# EAGLE board pc_pulse_v3 (EAGLE 6.6.0)
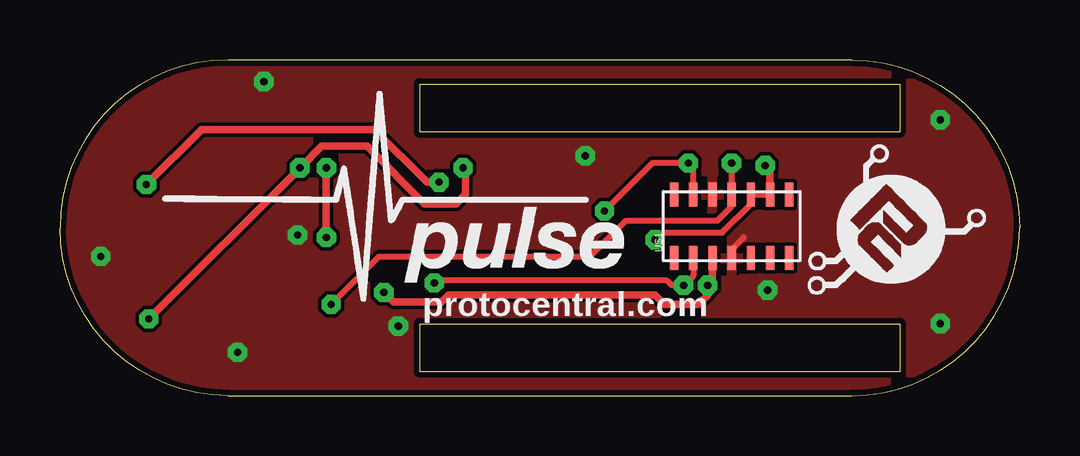
[diagram p0: board, top side]
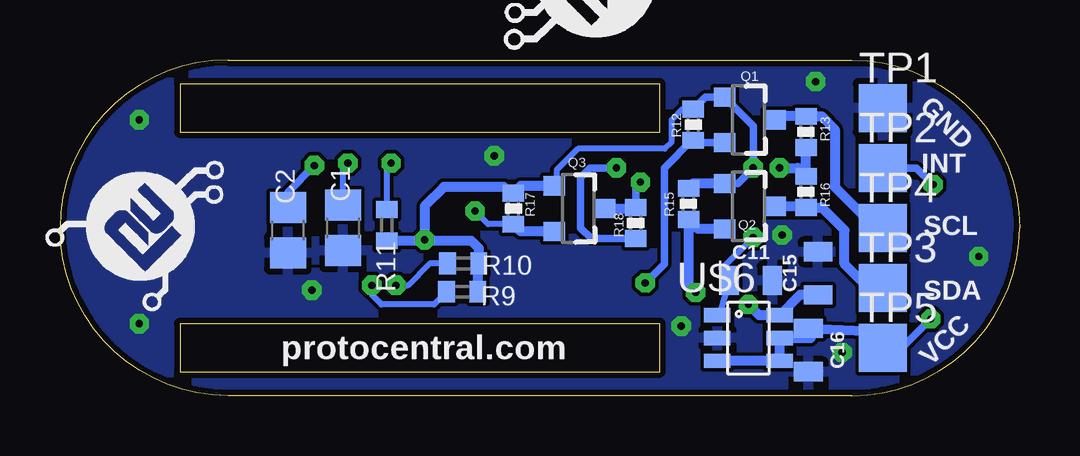
[diagram p1: board, bottom side, seen from below]

Size 40 x 14 mm. Coordinates in mm from the lower left corner, seen from the top.
Outline: 7,0 33,0 arc90 40,7 arc90 33,14 7,14 arc90 0,7 arc90 7,0
Outline: 15,13 35,13 35,11 15,11 15,13
Outline: 15,3 35,3 35,1 15,1 15,3
Copper layers (1*2*15*16): Top 0.035mm / dielectric 1.5mm / Route2 0.035mm / dielectric 0.15mm / Route15 0.035mm / dielectric 0.2mm / Bottom 0.035mm
Design rules "Circuitects-Rules": minimum track width 6mil, minimum drill 0.3mm, track to track 6mil, track to pad 6mil, pad to pad 6mil, via to via 6mil, smd to smd 6mil, copper to edge 10mil, drill to drill 8mil, minimum pad ring 12mil, minimum via ring 10mil, stop-mask expansion 4mil, vias tented up to drill 25mil, thermal gap 10mil

## Footprints (pad centres in the part's own frame; a part is rotated, then mirrored left to right if it is on the bottom)
C0805 = smd 1.3 x 1.5: 1 -0.95,0; 2 0.95,0
0805 = smd 0.8 x 1.2: 1 -0.9,0; 2 0.9,0
SOT23-3 = smd 0.8 x 0.9: 1 -0.95,-1; 2 0.95,-1; 3 0,1.1
R0402 = smd 0.7 x 0.9: 1 -0.65,0; 2 0.65,0
0402-RES = smd 0.7 x 0.9: 1 -0.65,0; 2 0.65,0
TP20SQ = smd 2 x 2: TP 0,0
OESIP-14 = smd 1 x 0.35: 1 -1.325,2.4; 2 -1.325,1.6; 3 -1.325,0.8; 4 -1.325,0; 5 -1.325,-0.8; 6 -1.325,-1.6; 7 -1.325,-2.4; 8 1.325,-2.4; 9 1.325,-1.6; 10 1.325,-0.8; 11 1.325,0; 12 1.325,0.8; 13 1.325,1.6; 14 1.325,2.4
SOT26 = smd 0.6 x 1.1: 1 -0.95,-1.3; 2 0,-1.3; 3 0.95,-1.3; 4 0.95,1.3; 5 0,1.3; 6 -0.95,1.3

## Placement (x,y rotation side)
C1  1uF  [C0805]  28.2,7 270 bottom
C2  10uF  [C0805]  30.5,6.9 270 bottom
C11  1.0uF  [0805]  11.2,4.8 0 bottom
C15  1.0uF  [0805]  8.4,5.1 90 bottom
C16  1.0uF  [0805]  8.8,1.9 270 bottom
Q1  BSS138  [SOT23-3]  11.3,11.5 270 bottom
Q2  BSS138  [SOT23-3]  11.3,7.9 270 bottom
Q3  BSS138  [SOT23-3]  18.4,7.8 270 bottom
R9  10k  [R0402]  23.23,4.33 0 bottom
R10  10k  [R0402]  23.19,5.51 0 bottom
R11  10k  [R0402]  26.37,7.11 270 bottom
R12  10K  [0402-RES]  13.6,11.3 270 bottom
R13  10K  [0402-RES]  8.9,11 90 bottom
R15  10K  [0402-RES]  13.8,8 270 bottom
R16  10K  [0402-RES]  8.9,8.5 270 bottom
R17  10K  [0402-RES]  21.1,7.8 270 bottom
R18  10K  [0402-RES]  16,7.2 90 bottom
TP1  PTR1TP20SQ  [TP20SQ]  5.7,12 0 bottom
TP2  PTR1TP20SQ  [TP20SQ]  5.7,9.5 0 bottom
TP3  PTR1TP20SQ  [TP20SQ]  5.7,4.5 0 bottom
TP4  PTR1TP20SQ  [TP20SQ]  5.7,7 0 bottom
TP5  PTR1TP20SQ  [TP20SQ]  5.7,2 0 bottom
U$1  MAX30100  [OESIP-14]  28,7.07 90 top
U$3  PROTY-LOGO  [LOGO-PROTY]  33.1,9.9 180 bottom
U$4  PULSE  [PULSE]  3.9,3.4 0 top
U$5  PROTY-LOGO  [LOGO-PROTY]  31.1,4.1 0 top
U$6  AP7312  [SOT26]  11.3,2.4 270 bottom
U$7  PROTY_LOGO_WITH_TEXT  [PROTY_WITH_TEXT]  38,14.8 0 bottom

## Library data of the parts
C1 C2 R9-R11 = rcl
C11 C15 C16 = SparkFun-Capacitors; PROD_ID: CAP-08064
Q1-Q3 R12 R13 R15-R18 = SparkFun
TP1-TP5 = testpad
U$1 U$3-U$7 = circuitects

## Nets
1.8V: C1.1 C15.1 U$1.11 U$6.6
+3V3: C2.1 C11.1 Q1.1 Q2.1 Q3.1 R9.2 R10.2 R11.2 R12.1 R15.1 R17.1 U$1.9 U$1.10 U$6.1
GND: C1.2 C2.2 C11.2 C15.2 C16.2 TP1.TP U$1.4 U$1.12 U$6.2
INT_IN: Q3.3 R18.2 TP2.TP
INT_OUT: Q3.2 R11.1 R17.2 U$1.13
SCL_IN: Q1.3 R13.2 TP4.TP
SCL_OUT: Q1.2 R10.1 R12.2 U$1.2
SDA_IN: Q2.3 R16.2 TP3.TP
SDA_OUT: Q2.2 R9.1 R15.2 U$1.3
VCC: C16.1 R13.1 R16.1 R18.1 TP5.TP U$6.3 U$6.4 U$6.5

## Tracks (layer width: path | path; a pad name or v marks a point on that pad's centre or on a via)
1.8V  (via drill 0.3)
  Top 0.254: v28,9.7 U$1.11 28,7.9 27.4,7.3 23.6,7.3 22.1,5.8 13.3,5.8 v11.3,3.8
  Bottom 0.254: C1.1 28.2,9.5 v28,9.7
  Bottom 0.406: C15.1 9.15,4.2 U$6.6 10.85,3.35 v11.3,3.8
+3V3  (via drill 0.3)
  Top 0.254: U$1.9 U$1.10 28.8,8 27.6,6.8 25.1,6.8 v24.8,6.5
  Top 0.305: v11.1,9.5 v11.1,6.6 | U$1.9 29.6,9.4 v29.4,9.6
  Bottom 0.254: R12.1 14.05,11.95 14.5,11.5 14.5,10.6 14.8,10.3 18.4,10.3 19.3,9.4 19.3,8.85 Q3.1 | 12.4,5.3 v11.1,6.6 | C11.1 12.5,3.45 U$6.1
  Bottom 0.305: C11.1 12.4,5.3 | Q2.1 11.75,8.85 v11.1,9.5 11.1,11.25 Q1.1 13.1,12.45 R12.1 | C2.1 30.5,8.5 v29.4,9.6
  Bottom 0.406: Q2.1 13.6,8.85 R15.1 | Q3.1 20.8,8.75 R17.1 21.25,8.45 21.5,8.7 24,8.7 24.8,7.9 v24.8,6.5 | R9.2 22.58,5.47 R10.2 22.54,6.14 22.86,6.46 24.76,6.46 v24.8,6.5 | R11.2 24.84,6.46 v24.8,6.5
GND  (via drill 0.3)
  Top 0.254: U$1.4 28,6.1 28.5,6.6
  other vias: 29.5,4.4 14.1,2.9 21.9,10 9.9,6.7 8.5,13.1 1.7,5.8 7.4,1.8 36.7,3 36.7,11.5
  pour Top: -0.1,14.1 39.9,14.2 40.2,0 0.2,-0.1
  pour Bottom: -0.1,14 39.9,14.2 40.2,0.1 0.2,-0.1
INT_IN  (via drill 0.3)
  Top 0.305: v3.6,8.8 5.9,11.1 13.1,11.1 15.3,8.9 v15.8,8.9
  Bottom 0.305: TP2.TP 4.3,9.5 v3.6,8.8 | R18.2 16,8.7 v15.8,8.9
  Bottom 0.406: Q3.3 16.05,7.8 R18.2
INT_OUT  (via drill 0.3)
  Top 0.254: U$1.13 26.4,9.5 v26.2,9.7 24.7,9.7 v22.7,7.7
  Bottom 0.254: R11.1 26.37,9.47 v26.2,9.7 | R17.2 22.15,7.15 v22.7,7.7
  Bottom 0.406: Q3.2 20.8,6.85 R17.2
SCL_IN
  Bottom 0.406: TP4.TP 6,7 7.7,8.7 7.7,11.1 8.25,11.65 R13.2 10.05,11.65 Q1.3
SCL_OUT  (via drill 0.3)
  Top 0.254: U$1.2 26.4,5 v26,4.6 25.5,4.6 25.3,4.8 15.8,4.8 v15.6,4.7
  Bottom 0.254: v26,4.6 25.5,4.6 24.59,5.51 R10.1
  Bottom 0.305: Q1.2 13.5,10.55 R12.2 13.65,10.65 14.8,9.5 14.8,5.5 v15.6,4.7
SDA_IN
  Bottom 0.406: Q2.3 8.95,7.9 R16.2 8.25,7.85 7.3,6.9 7.3,5.5 6.3,4.5 TP3.TP
SDA_OUT  (via drill 0.3)
  Top 0.305: 13.6,4.2 v13.5,4.3 13.9,3.9 15.9,3.9 16.2,4.2 24.8,4.2 25.2,3.8 26.6,3.8 27,4.2 v27,4.6 27.2,4.8 U$1.3
  Bottom 0.254: 23.88,4.12 R9.1 24.41,3.8 26.6,3.8 27,4.2 v27,4.6
  Bottom 0.406: Q2.2 13.4,6.95 R15.2 13.8,4.6 v13.5,4.3
VCC  (via drill 0.3)
  Top 0.305: v3.7,3.2 v10,9.5 10.9,10.4 12.8,10.4 15.2,8 16.5,8 16.9,8.4 16.9,9.4 v16.8,9.5
  Bottom 0.305: TP5.TP 4.9,2 v3.7,3.2 | R18.1 17.85,6.55 18.3,7 18.3,9.1 17.9,9.5 v16.8,9.5
  Bottom 0.406: 6.35,1.35 TP5.TP 6.4,2.7 C16.1 8.7,2.4 U$6.5 U$6.4 U$6.3 | R13.1 R16.1 9.25,9.5 v10,9.5

## Text on the board
tPlace: protocentral.com
bPlace: GND | INT | SCL | SDA | protocentral.com | VCC